# Altium PCB Bodge10080.PcbDoc
Units mm, origin at the board's own origin, x right, y up, seen from the top; angles counter-clockwise.
Board outline 100 x 80 mm, 2 copper layers (Top Layer, Bottom Layer); 9 components, 30 nets, 620 pads, 57 vias.
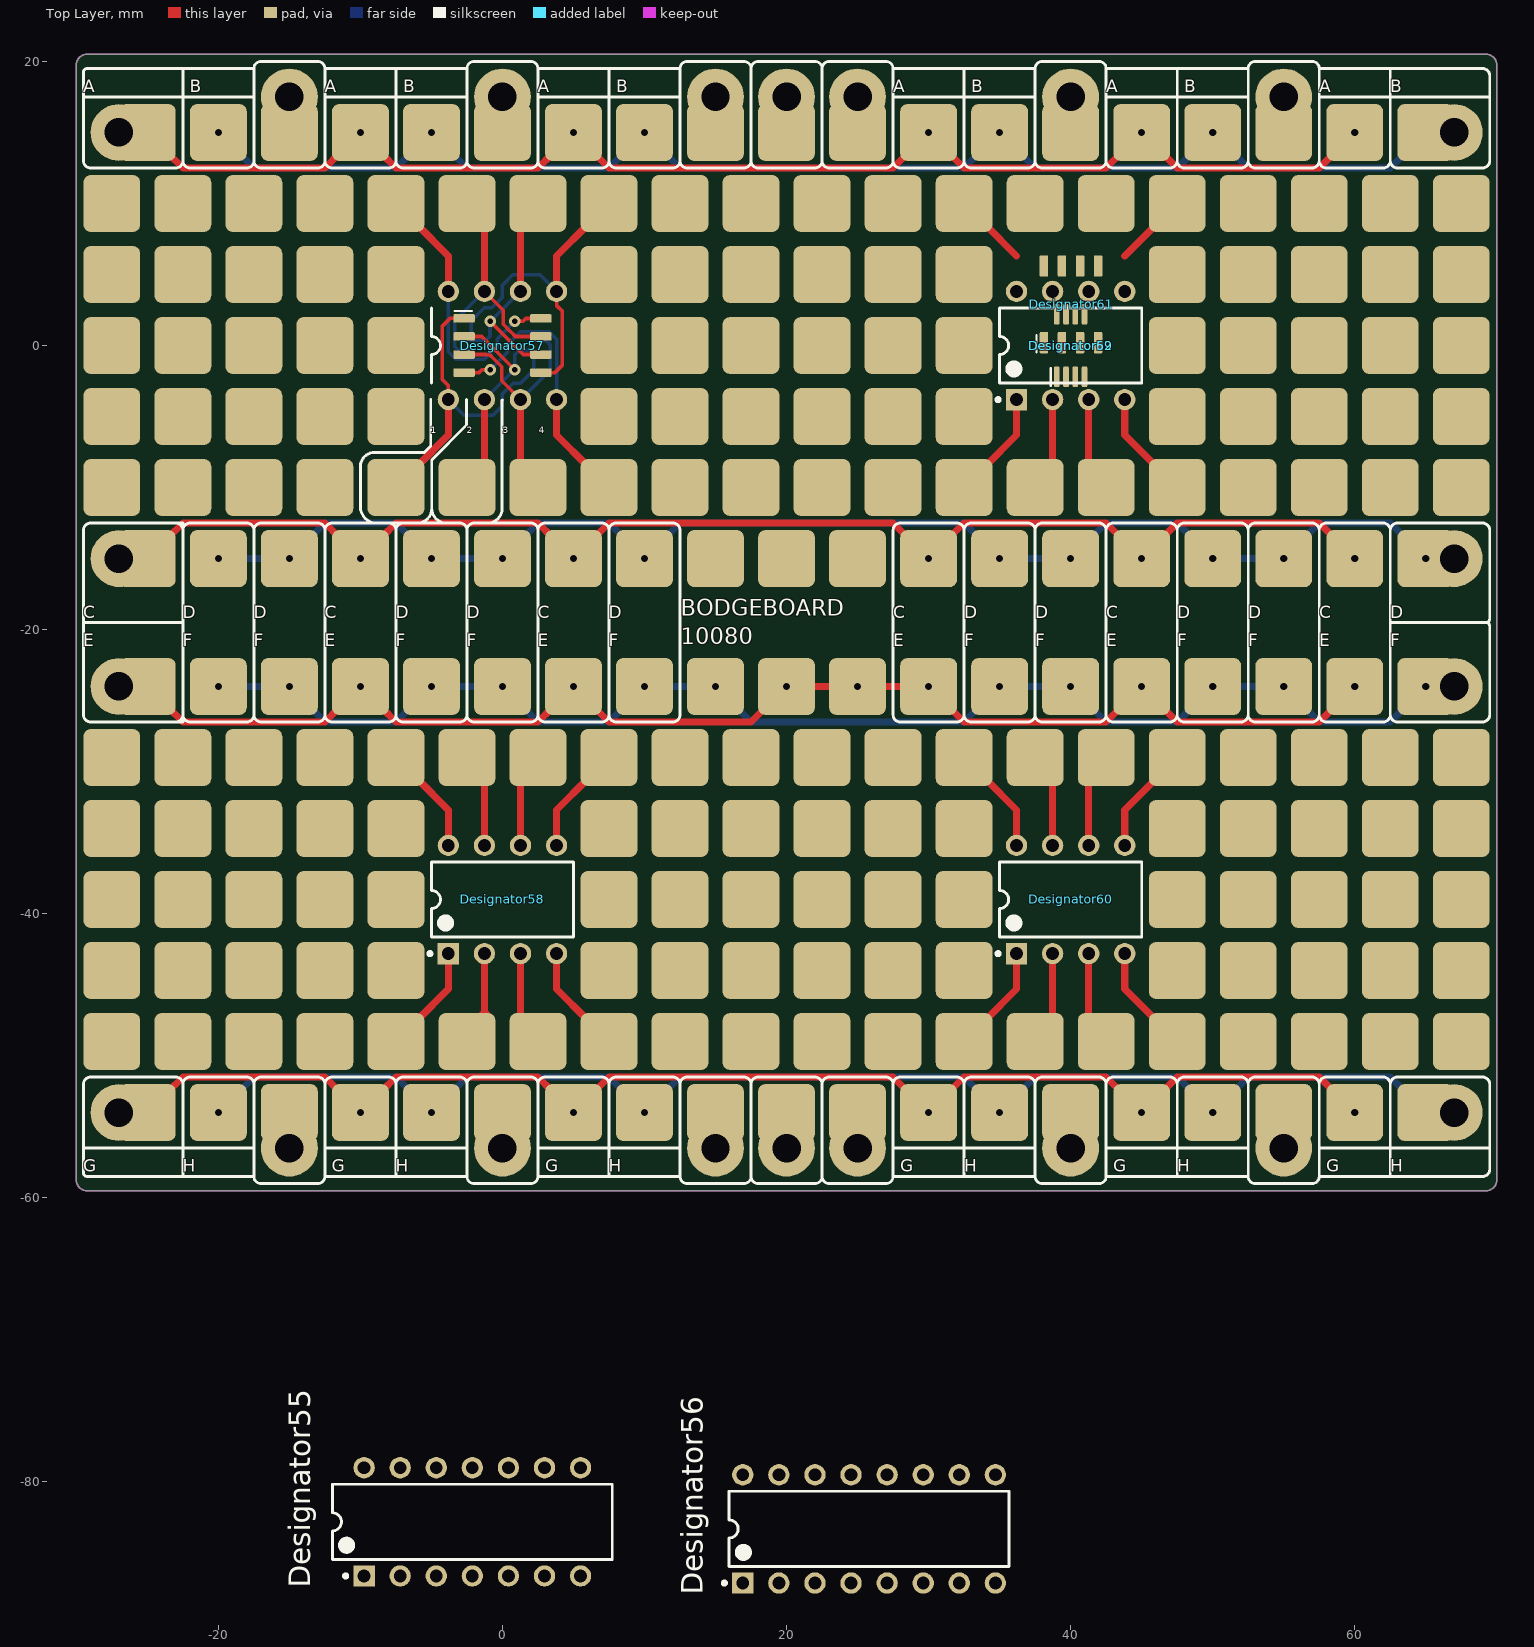
[diagram p0: Top Layer view]
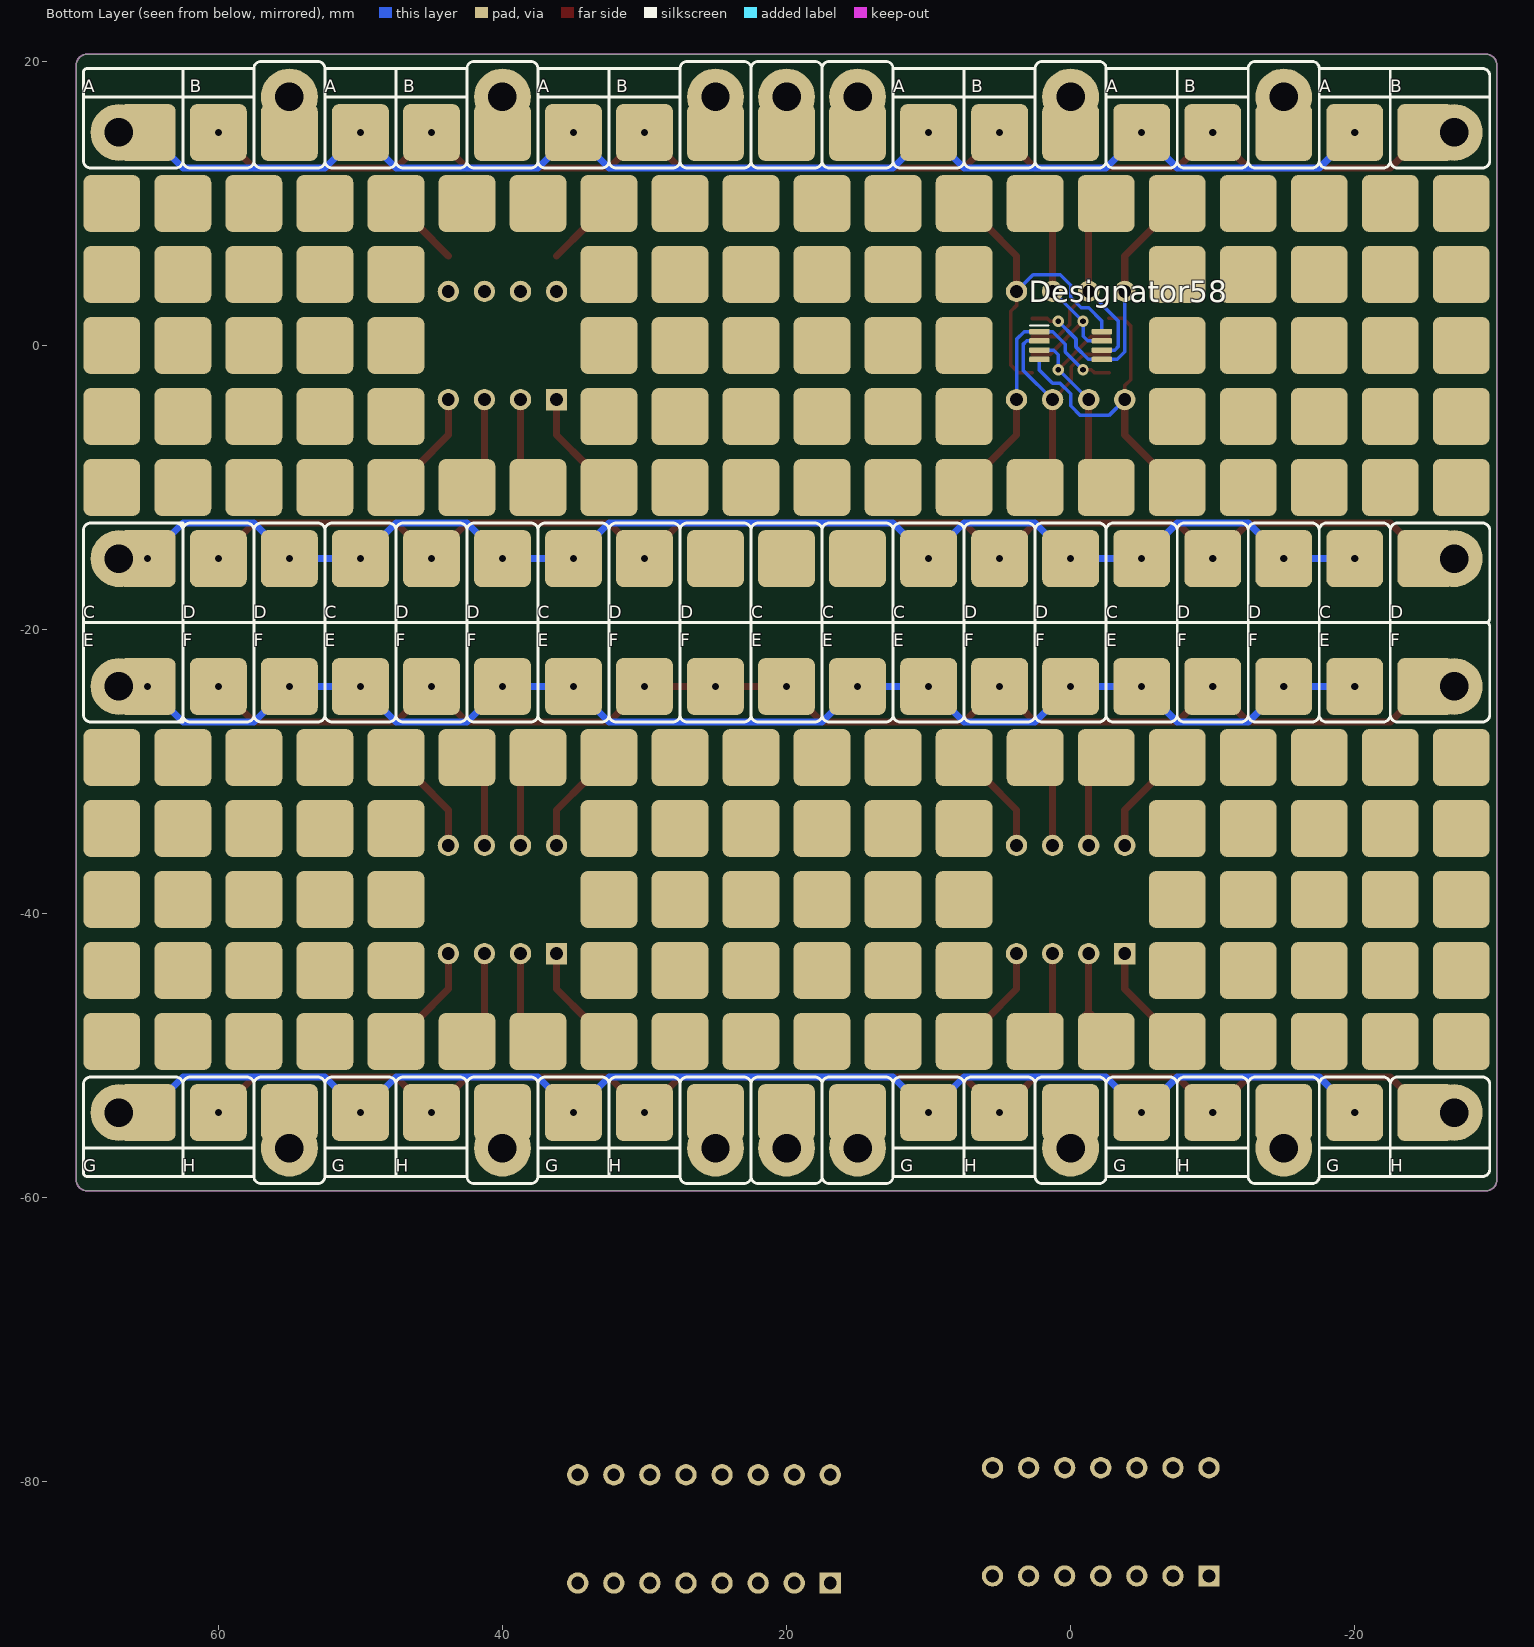
[diagram p1: Bottom Layer view, seen from below]

## Layer stack, top to bottom
Top Solder: solder mask 0.0102, Solder Resist, Dk 3.5
Top Layer: signal copper 0.0356
Dielectric 1: dielectric 0.32, FR-4, Dk 4.8
Bottom Layer: signal copper 0.0356
Bottom Solder: solder mask 0.0102, Solder Resist, Dk 3.5

## Board outline
-30,-58.75 -30,19.75 cw(c-29.25,19.75) -29.25,20.5 69.25,20.5 cw(c69.25,19.75) 70,19.75 70,-58.75 cw(c69.25,-58.75) 69.25,-59.5 -29.25,-59.5 cw(c-29.25,-58.75)

## Design rules (kind name [scope] priority, off if disabled: settings)
Clearance [All] p1: gap=0.2 ignorepadtopadclearanceinfootprint=FALSE
PolygonConnect [All] p1: connectstyle=Relief reliefconductorwidth=0.254 reliefentries=4 polygonreliefangle="90 Angle" airgapwidth=0.254
RoutingVias [All] p1: holewidth=0.4 width=0.8 viastyle="Through Hole" minholewidth=0.3 minwidth=0.4 maxholewidth=0.7 maxwidth=1
SolderMaskExpansion [All] p1: expansion=0.102 istentingtop=FALSE
Width [All] p1: maxlimit=1 minlimit=0.2 preferedwidth=0.5
30 further rules are at their usual default settings.

## Components (designator, comment, footprint, x,y, rotation, side; value= is the part's Value field where it differs from the comment)
Designator55 "Comment" TI-N0014A -2.12,-82.81 r90 top
Designator56 "Comment" N0016A 25.81,-83.31 r90 top
Designator57 "Comment" SO127P600X500-8 0,0 r0 top locked
Designator58 "Comment" SO65P490X300-8 0,0 r180 bottom locked
Designator58 "Comment" VISH-DIP8 0,-39 r90 top
Designator59 "Comment" VISH-DIP8 40,0 r90 top
Designator60 "Comment" VISH-DIP8 40,-39 r90 top
Designator61 "Comment" SO127P600X500-8 40.025,2.9 r90 top locked
Designator62 "Comment" SO65P490X300-8 40,0 r90 top locked

## Footprints (in the part's own frame and the unit in brackets; to place one, negate y for a bottom-side part, rotate by r counter-clockwise, add the part's x,y. Pads: shape width x height; smd on the part's side, far side on the other; paste and mask are expansions set on the pad)
N0016A [mm] "DIP, 16-Leads, Body 19.7x6.6mm, Pitch 2.54mm"
  rect 1.5x1.5 hole 0.9: 1(-3.81,8.89)
  round 1.5 hole 0.9: 2(-3.81,6.35) 3(-3.81,3.81) 4(-3.81,1.27) 5(-3.81,-1.27) 6(-3.81,-3.81) 7(-3.81,-6.35) 8(-3.81,-8.89) 9(3.81,-8.89) 10(3.81,-6.35) 11(3.81,-3.81) 12(3.81,-1.27) 13(3.81,1.27) 14(3.81,3.81) 15(3.81,6.35) 16(3.81,8.89)
  silkscreen extent -3.93,-9.85 2.65,10.31, body extent -3.95,-9.85 3.95,9.85, height 5.08
SO65P490X300-8 [mm] "SO 0.65mm Pitch , 4.9mm Span, 3.00mm Body width, 8 Pins"
  rrect50% 1.45x0.4 smd paste+0 mask+0.05: 1(-2.2,0.975) 2(-2.2,0.325) 3(-2.2,-0.325) 4(-2.2,-0.975) 5(2.2,-0.975) 6(2.2,-0.325) 7(2.2,0.325) 8(2.2,0.975)
  silkscreen extent -2.85,1.4 -1.58,1.4, body extent -2.45,-1.5 2.45,1.5, height 1.1
SO127P600X500-8 [mm] "SO 1.27mm Pitch, 6.00mm Span, 5mm Body Width, 8 Pins"
  rrect25% 1.5x0.6 smd paste+0 mask+0.05: 1(-2.7,1.905) 2(-2.7,0.635) 3(-2.7,-0.635) 4(-2.7,-1.905) 5(2.7,-1.905) 6(2.7,-0.635) 7(2.7,0.635) 8(2.7,1.905)
  silkscreen extent -3.38,2.42 -2.15,2.42, body extent -3,-2.5 3,2.5, height 1.75
TI-N0014A [mm] "DIP, 14-Leads, Body 19.7x6.6mm, Pitch 2.54mm"
  rect 1.5x1.5 hole 0.9: 1(-3.81,7.62)
  round 1.5 hole 0.9: 2(-3.81,5.08) 3(-3.81,2.54) 4(-3.81,0) 5(-3.81,-2.54) 6(-3.81,-5.08) 7(-3.81,-7.62) 8(3.81,-7.62) 9(3.81,-5.08) 10(3.81,-2.54) 11(3.81,0) 12(3.81,2.54) 13(3.81,5.08) 14(3.81,7.62)
  silkscreen extent -3.93,-9.85 2.65,9.85, body extent -3.95,-9.85 3.95,9.85, height 5.08
VISH-DIP8 [mm] "DIP, 8-Leads, Body 9.9x6.8mm, Pitch 2.54mm"
  rect 1.5x1.5 hole 0.9: 1(-3.81,3.81)
  round 1.5 hole 0.9: 2(-3.81,1.27) 3(-3.81,-1.27) 4(-3.81,-3.81) 5(3.81,-3.81) 6(3.81,-1.27) 7(3.81,1.27) 8(3.81,3.81)
  silkscreen extent -3.93,-5 2.65,5.23, body extent -3.95,-4.95 3.95,4.95, height 4.58

## Free pads (board coordinates)
  rrect25% 4x4 smd mask+0.1: 1(-27.5,-49) 1(-27.5,-44) 1(-27.5,-39) 1(-27.5,-34) 1(-27.5,-29) 1(-27.5,-10) 1(-27.5,-5) 1(-27.5,0) 1(-27.5,5) 1(-27.5,10) 3(-22.5,-49) 3(-22.5,-44) 3(-22.5,-39) 3(-22.5,-34) 3(-22.5,-29) 3(-22.5,-10) 3(-22.5,-5) 3(-22.5,0) 3(-22.5,5) 3(-22.5,10) 4(-17.5,-49) 4(-17.5,-44) 4(-17.5,-39) 4(-17.5,-34) 4(-17.5,-29) 4(-17.5,-10) 4(-17.5,-5) 4(-17.5,0) 4(-17.5,5) 4(-17.5,10) 5(-12.5,-49) 5(-12.5,-44) 5(-12.5,-39) 5(-12.5,-34) 5(-12.5,-29) 5(-12.5,-10) 5(-12.5,-5) 5(-12.5,0) 5(-12.5,5) 5(-12.5,10) 6(-7.5,-49) 6(-7.5,-44) 6(-7.5,-39) 6(-7.5,-34) 6(-7.5,-29) 6(-7.5,-10) 6(-7.5,-5) 6(-7.5,0) 6(-7.5,5) 6(-7.5,10) 7(-2.5,-49) 7(-2.5,-29) 7(-2.5,-10) 7(-2.5,10) 8(2.5,-49) 8(2.5,-29) 8(2.5,-10) 8(2.5,10) 9(7.5,-49) 9(7.5,-44) 9(7.5,-39) 9(7.5,-34) 9(7.5,-29) 9(7.5,-10) 9(7.5,-5) 9(7.5,0) 9(7.5,5) 9(7.5,10) 10(12.5,-49) 10(12.5,-44) 10(12.5,-39) 10(12.5,-34) 10(12.5,-29) 10(12.5,-10) 10(12.5,-5) 10(12.5,0) 10(12.5,5) 10(12.5,10) 11(17.5,-49) 11(17.5,-44) 11(17.5,-39) 11(17.5,-34) 11(17.5,-29) 11(17.5,-10) 11(17.5,-5) 11(17.5,0) 11(17.5,5) 11(17.5,10) 12(22.5,-49) 12(22.5,-44) 12(22.5,-39) 12(22.5,-34) 12(22.5,-29) 12(22.5,-10) 12(22.5,-5) 12(22.5,0) 12(22.5,5) 12(22.5,10) 13(27.5,-49) 13(27.5,-44) 13(27.5,-39) 13(27.5,-34) 13(27.5,-29) 13(27.5,-10) 13(27.5,-5) 13(27.5,0) 13(27.5,5) 13(27.5,10) 14(32.5,-49) 14(32.5,-44) 14(32.5,-39) 14(32.5,-34) 14(32.5,-29) 14(32.5,-10) 14(32.5,-5) 14(32.5,0) 14(32.5,5) 14(32.5,10) 15(37.5,-49) 15(37.5,-29) 15(37.5,-10) 15(37.5,10) 16(42.5,-49) 16(42.5,-29) 16(42.5,-10) 16(42.5,10) 17(47.5,-49) 17(47.5,-44) 17(47.5,-39) 17(47.5,-34) 17(47.5,-29) 17(47.5,-10) 17(47.5,-5) 17(47.5,0) 17(47.5,5) 17(47.5,10) 18(52.5,-49) 18(52.5,-44) 18(52.5,-39) 18(52.5,-34) 18(52.5,-29) 18(52.5,-10) 18(52.5,-5) 18(52.5,0) 18(52.5,5) 18(52.5,10) 19(57.5,-49) 19(57.5,-44) 19(57.5,-39) 19(57.5,-34) 19(57.5,-29) 19(57.5,-10) 19(57.5,-5) 19(57.5,0) 19(57.5,5) 19(57.5,10) 20(62.5,-49) 20(62.5,-44) 20(62.5,-39) 20(62.5,-34) 20(62.5,-29) 20(62.5,-10) 20(62.5,-5) 20(62.5,0) 20(62.5,5) 20(62.5,10) 21(67.5,-49) 21(67.5,-44) 21(67.5,-39) 21(67.5,-34) 21(67.5,-29) 21(67.5,-10) 21(67.5,-5) 21(67.5,0) 21(67.5,5) 21(67.5,10) 22(65,-54) 22(65,-24) 22(65,-15) 23(60,-54) 23(60,-24) 23(60,-15) 23(60,15) 24(55,-54) 24(55,-24) 24(55,-15) 24(55,15) 25(50,-54) 25(50,-24) 25(50,-15) 25(50,15) 26(45,-54) 26(45,-24) 26(45,-15) 26(45,15) 27(40,-54) 27(40,-24) 27(40,-15) 27(40,15) 28(35,-54) 28(35,-24) 28(35,-15) 28(35,15) 29(30,-54) 29(30,-24) 29(30,-15) 29(30,15) 30(25,-54) 30(25,-24) 30(25,-15) 30(25,15) 31(20,-54) 31(20,-24) 31(20,-15) 31(20,15) 32(15,-54) 32(15,-24) 32(15,-15) 32(15,15) 33(10,-54) 33(10,-24) 33(10,-15) 33(10,15) 34(5,-54) 34(5,-24) 34(5,-15) 34(5,15) 35(0,-54) 35(0,-24) 35(0,-15) 35(0,15) 36(-5,-54) 36(-5,-24) 36(-5,-15) 36(-5,15) 37(-10,-54) 37(-10,-24) 37(-10,-15) 37(-10,15) 38(-15,-54) 38(-15,-24) 38(-15,-15) 38(-15,15) 39(-20,-54) 39(-20,-24) 39(-20,-15) 39(-20,15) 40(-25,-54) 40(-25,-24) 40(-25,-15) 40(-25,15)
  round 4 hole 2 mask+0.05: 1(-27,-54) 1(-27,-24) 1(-27,-15) 1(-27,15) 1(-15,-56.5) 1(-15,17.5) 1(0,-56.5) 1(0,17.5) 1(15,-56.5) 1(15,17.5) 1(20,-56.5) 1(20,17.5) 1(25,-56.5) 1(25,17.5) 1(40,-56.5) 1(40,17.5) 1(55,-56.5) 1(55,17.5) 2(67,-54) 2(67,-24) 2(67,-15)
  round 1.5 hole 0.9: 1(-3.81,-3.81) 2(-1.27,-3.81) 3(1.27,-3.81) 4(3.81,-3.81) 5(3.81,3.81) 6(1.27,3.81) 7(-1.27,3.81) 8(-3.81,3.81)
  rrect25% 4x4 smd far side mask+0.1: 1(67.5,-49) 1(67.5,-44) 1(67.5,-39) 1(67.5,-34) 1(67.5,-29) 1(67.5,-10) 1(67.5,-5) 1(67.5,0) 1(67.5,5) 1(67.5,10) 3(62.5,-49) 3(62.5,-44) 3(62.5,-39) 3(62.5,-34) 3(62.5,-29) 3(62.5,-10) 3(62.5,-5) 3(62.5,0) 3(62.5,5) 3(62.5,10) 4(57.5,-49) 4(57.5,-44) 4(57.5,-39) 4(57.5,-34) 4(57.5,-29) 4(57.5,-10) 4(57.5,-5) 4(57.5,0) 4(57.5,5) 4(57.5,10) 5(52.5,-49) 5(52.5,-44) 5(52.5,-39) 5(52.5,-34) 5(52.5,-29) 5(52.5,-10) 5(52.5,-5) 5(52.5,0) 5(52.5,5) 5(52.5,10) 6(47.5,-49) 6(47.5,-44) 6(47.5,-39) 6(47.5,-34) 6(47.5,-29) 6(47.5,-10) 6(47.5,-5) 6(47.5,0) 6(47.5,5) 6(47.5,10) 7(42.5,-49) 7(42.5,-29) 7(42.5,-10) 7(42.5,10) 8(37.5,-49) 8(37.5,-29) 8(37.5,-10) 8(37.5,10) 9(32.5,-49) 9(32.5,-44) 9(32.5,-39) 9(32.5,-34) 9(32.5,-29) 9(32.5,-10) 9(32.5,-5) 9(32.5,0) 9(32.5,5) 9(32.5,10) 10(27.5,-49) 10(27.5,-44) 10(27.5,-39) 10(27.5,-34) 10(27.5,-29) 10(27.5,-10) 10(27.5,-5) 10(27.5,0) 10(27.5,5) 10(27.5,10) 11(22.5,-49) 11(22.5,-44) 11(22.5,-39) 11(22.5,-34) 11(22.5,-29) 11(22.5,-10) 11(22.5,-5) 11(22.5,0) 11(22.5,5) 11(22.5,10) 12(17.5,-49) 12(17.5,-44) 12(17.5,-39) 12(17.5,-34) 12(17.5,-29) 12(17.5,-10) 12(17.5,-5) 12(17.5,0) 12(17.5,5) 12(17.5,10) 13(12.5,-49) 13(12.5,-44) 13(12.5,-39) 13(12.5,-34) 13(12.5,-29) 13(12.5,-10) 13(12.5,-5) 13(12.5,0) 13(12.5,5) 13(12.5,10) 14(7.5,-49) 14(7.5,-44) 14(7.5,-39) 14(7.5,-34) 14(7.5,-29) 14(7.5,-10) 14(7.5,-5) 14(7.5,0) 14(7.5,5) 14(7.5,10) 15(2.5,-49) 15(2.5,-29) 15(2.5,-10) 15(2.5,10) 16(-2.5,-49) 16(-2.5,-29) 16(-2.5,-10) 16(-2.5,10) 17(-7.5,-49) 17(-7.5,-44) 17(-7.5,-39) 17(-7.5,-34) 17(-7.5,-29) 17(-7.5,-10) 17(-7.5,-5) 17(-7.5,0) 17(-7.5,5) 17(-7.5,10) 18(-12.5,-49) 18(-12.5,-44) 18(-12.5,-39) 18(-12.5,-34) 18(-12.5,-29) 18(-12.5,-10) 18(-12.5,-5) 18(-12.5,0) 18(-12.5,5) 18(-12.5,10) 19(-17.5,-49) 19(-17.5,-44) 19(-17.5,-39) 19(-17.5,-34) 19(-17.5,-29) 19(-17.5,-10) 19(-17.5,-5) 19(-17.5,0) 19(-17.5,5) 19(-17.5,10) 20(-22.5,-49) 20(-22.5,-44) 20(-22.5,-39) 20(-22.5,-34) 20(-22.5,-29) 20(-22.5,-10) 20(-22.5,-5) 20(-22.5,0) 20(-22.5,5) 20(-22.5,10) 21(-27.5,-49) 21(-27.5,-44) 21(-27.5,-39) 21(-27.5,-34) 21(-27.5,-29) 21(-27.5,-10) 21(-27.5,-5) 21(-27.5,0) 21(-27.5,5) 21(-27.5,10) 22(65,-54) 22(65,-24) 22(65,-15) 23(60,-54) 23(60,-24) 23(60,-15) 23(60,15) 24(55,-54) 24(55,-24) 24(55,-15) 24(55,15) 25(50,-54) 25(50,-24) 25(50,-15) 25(50,15) 26(45,-54) 26(45,-24) 26(45,-15) 26(45,15) 27(40,-54) 27(40,-24) 27(40,-15) 27(40,15) 28(35,-54) 28(35,-24) 28(35,-15) 28(35,15) 29(30,-54) 29(30,-24) 29(30,-15) 29(30,15) 30(25,-54) 30(25,-24) 30(25,-15) 30(25,15) 31(20,-54) 31(20,-24) 31(20,-15) 31(20,15) 32(15,-54) 32(15,-24) 32(15,-15) 32(15,15) 33(10,-54) 33(10,-24) 33(10,-15) 33(10,15) 34(5,-54) 34(5,-24) 34(5,-15) 34(5,15) 35(0,-54) 35(0,-24) 35(0,-15) 35(0,15) 36(-5,-54) 36(-5,-24) 36(-5,-15) 36(-5,15) 37(-10,-54) 37(-10,-24) 37(-10,-15) 37(-10,15) 38(-15,-54) 38(-15,-24) 38(-15,-15) 38(-15,15) 39(-20,-54) 39(-20,-24) 39(-20,-15) 39(-20,15) 40(-25,-54) 40(-25,-24) 40(-25,-15) 40(-25,15)
  round 4 hole 2 mask+0.1: 2(67,15)
  rrect25% 4x4 smd mask-4: 22(65,15)
  rrect25% 4x4 smd far side mask-4: 22(65,15)

## Via types
v1: diameter 1.1, hole 0.5, Top Layer to Bottom Layer, 53 vias
v2: diameter 0.8, hole 0.4, Top Layer to Bottom Layer, 4 vias

## Nets (pads, with @x,y where several pads share a name; then routed paths per layer and width w, separated by ;. In a path a pad name is that pad's centre, name@x,y a point inside that pad or via, vN(x,y) a via of type N, cw(c..) or ccw(c..) an arc to the next point about the centre after c; other vN are vias at no path point)
A: pad.1@-27,15 pad.23@60,15 pad.26@45,15 pad.29@30,15 pad.34@5,15 pad.37@-10,15 pad.40@-25,15 | length 86.2
  Top Layer w0.5: pad.40@-23.5,13.5 -22.5,12.5 -17.5,12.5 -12.5,12.5 pad.37@-11.5,13.5 ; pad.37@-8.5,13.5 -7.5,12.5 -2.5,12.5 2.5,12.5 pad.34@3.5,13.5 ; v1(5,15) 7.5,12.5 27.5,12.5 pad.29@29.5,14.5 ; v1(30,15) 32.5,12.5 42.5,12.5 v1(45,15) 47.5,12.5 57.5,12.5 v1(60,15)
  other v1: -10,15
B: pad.2@67,15 pad.22@65,15 pad.25@50,15 pad.28@35,15 pad.33@10,15 pad.36@-5,15 pad.39@-20,15 | length 94.6
  Bottom Layer w0.5: v1(-20,15) -17.5,12.5 -7.5,12.5 -5.5,14.5 v1(-5,15) -2.5,12.5 7.5,12.5 v1(10,15) 12.5,12.5 32.5,12.5 v1(35,15) 37.5,12.5 47.5,12.5 v1(50,15) 52.5,12.5 62.5,12.5 pad.22@64.5,14.5
C: pad.1@-27,-15 pad.23@60,-15 pad.26@45,-15 pad.29@30,-15 pad.34@5,-15 pad.37@-10,-15 pad.40@-25,-15 | length 86.9
  Top Layer w0.5: pad.40@-23.5,-13.5 -22.5,-12.5 -12.5,-12.5 pad.37@-11.5,-13.5 ; pad.37@-8.5,-13.5 -7.5,-12.5 2.5,-12.5 pad.34@3.5,-13.5 ; v1(5,-15) 7.5,-12.5 27.5,-12.5 v1(30,-15) 32.5,-12.5 42.5,-12.5 v1(45,-15) 47.5,-12.5 57.5,-12.5 v1(60,-15)
  other v1: -10,-15
D: pad.2@67,-15 pad.22@65,-15 pad.24@55,-15 pad.25@50,-15 pad.27@40,-15 pad.28@35,-15 pad.33@10,-15 pad.35@0,-15 pad.36@-5,-15 pad.38@-15,-15 pad.39@-20,-15 | length 95.4
  Bottom Layer w0.5: v1(-20,-15) v1(-15,-15) -12.5,-12.5 -7.5,-12.5 v1(-5,-15) v1(0,-15) 2.5,-12.5 7.5,-12.5 v1(10,-15) 12.5,-12.5 32.5,-12.5 v1(35,-15) v1(40,-15) 42.5,-12.5 47.5,-12.5 v1(50,-15) v1(55,-15) 57.5,-12.5 62.5,-12.5 v1(65,-15)
E: pad.1@-27,-24 pad.23@60,-24 pad.26@45,-24 pad.29@30,-24 pad.30@25,-24 pad.31@20,-24 pad.34@5,-24 pad.37@-10,-24 pad.40@-25,-24 | length 104.5
  Top Layer w0.5: pad.40@-23.5,-25.5 -22.5,-26.5 -17.5,-26.5 -12.5,-26.5 pad.37@-11.5,-25.5 ; pad.37@-8.5,-25.5 -7.5,-26.5 -2.5,-26.5 2.5,-26.5 pad.34@3.5,-25.5 ; 7.5,-26.5 v1(5,-24) 7.5,-26.5 ; 7.5,-26.5 17.5,-26.5 v1(20,-24) v1(30,-24) ; v1(30,-24) 32.5,-26.5 ; v1(30,-24) 32.5,-26.5 ; 32.5,-26.5 42.5,-26.5 ; 42.5,-26.5 v1(45,-24) ; 42.5,-26.5 v1(45,-24) ; v1(45,-24) 47.5,-26.5 ; v1(45,-24) 47.5,-26.5 ; 47.5,-26.5 57.5,-26.5 ; 57.5,-26.5 v1(60,-24) 57.5,-26.5
  other v1: -10,-24 25,-24
F: pad.2@67,-24 pad.22@65,-24 pad.24@55,-24 pad.25@50,-24 pad.27@40,-24 pad.28@35,-24 pad.32@15,-24 pad.33@10,-24 pad.35@0,-24 pad.36@-5,-24 pad.38@-15,-24 pad.39@-20,-24 | length 95.4
  Bottom Layer w0.5: v1(-20,-24) v1(-15,-24) -12.5,-26.5 -7.5,-26.5 v1(-5,-24) v1(0,-24) 2.5,-26.5 7.5,-26.5 v1(10,-24) v1(15,-24) 17.5,-26.5 32.5,-26.5 v1(35,-24) v1(40,-24) 42.5,-26.5 47.5,-26.5 v1(50,-24) v1(55,-24) 57.5,-26.5 62.5,-26.5 v1(65,-24)
G: pad.1@-27,-54 pad.23@60,-54 pad.26@45,-54 pad.29@30,-54 pad.34@5,-54 pad.37@-10,-54 pad.40@-25,-54 | length 86.2
  Top Layer w0.5: pad.40@-23.5,-52.5 -22.5,-51.5 -17.5,-51.5 -12.5,-51.5 pad.37@-11.5,-52.5 ; pad.37@-8.5,-52.5 -7.5,-51.5 -2.5,-51.5 2.5,-51.5 pad.34@3.5,-52.5 ; v1(5,-54) 7.5,-51.5 27.5,-51.5 pad.29@29.5,-53.5 ; v1(30,-54) 32.5,-51.5 42.5,-51.5 v1(45,-54) 47.5,-51.5 57.5,-51.5 v1(60,-54)
  other v1: -10,-54
H: pad.2@67,-54 pad.22@65,-54 pad.25@50,-54 pad.28@35,-54 pad.33@10,-54 pad.36@-5,-54 pad.39@-20,-54 | length 94.6
  Bottom Layer w0.5: v1(-20,-54) -17.5,-51.5 -7.5,-51.5 -5.5,-53.5 v1(-5,-54) -2.5,-51.5 7.5,-51.5 v1(10,-54) 12.5,-51.5 32.5,-51.5 v1(35,-54) 37.5,-51.5 47.5,-51.5 v1(50,-54) 52.5,-51.5 62.5,-51.5 pad.22@64.5,-53.5
IO1: pad.1@-15,17.5 pad.38@-15,15
IO2: pad.1@0,17.5 pad.35@0,15
IO3: pad.1@15,17.5 pad.32@15,15
IO4: pad.1@20,17.5 pad.31@20,15
IO5: pad.1@25,17.5 pad.30@25,15
IO6: pad.1@40,17.5 pad.27@40,15
IO7: pad.1@55,17.5 pad.24@55,15
IO8: pad.1@55,-56.5 pad.24@55,-54
IO9: pad.1@40,-56.5 pad.27@40,-54
IO10: pad.1@25,-56.5 pad.30@25,-54
IO11: pad.1@20,-56.5 pad.31@20,-54
IO12: pad.1@15,-56.5 pad.32@15,-54
IO13: pad.1@0,-56.5 pad.35@0,-54
IO14: pad.1@-15,-56.5 pad.38@-15,-54
UA1: Designator57.1 Designator58.4@2.2,-0.975 pad.1@-3.81,-3.81 pad.6@-7.5,-10 | length 21.7
  Top Layer w0.25: pad.1@-3.81,-3.81 -3.81,-2.815 -4.225,-2.4 -4.225,1.375 -3.695,1.905 Designator57.1
  Top Layer w0.5: pad.6@-6,-8.5 -3.81,-6.31 pad.1@-3.81,-3.81
  Bottom Layer w0.25: pad.1@-3.81,-3.81 -2.695,-4.925 -0.675,-4.925 0,-4.25 0,-3.4 0.75,-2.65 1.275,-2.65 2.2,-1.725 Designator58.4@2.2,-0.975
UA2: Designator57.2 Designator58.3@2.2,-0.325 pad.2@-1.27,-3.81 pad.7@-2.5,-10 | length 15.1
  Top Layer w0.254: Designator57.2 -1.46,0.635 v2@0.875,-1.7
  Top Layer w0.5: pad.7@-1.27,-8.27 pad.2@-1.27,-3.81
  Bottom Layer w0.25: pad.2@-1.7,-3.38 -1.27,-3.81 0.84,-1.7 0.875,-1.7 0.875,-0.65 1.2,-0.325 Designator58.3@2.2,-0.325
  other v2: 0.87,-1.7
UA3: Designator57.3 Designator58.2@2.2,0.325 pad.3@1.27,-3.81 pad.8@2.5,-10 | length 16.3
  Top Layer w0.25: -0.915,-0.635 -0.575,-0.975 -0.57,-0.975 -0.05,-1.495 -0.05,-2.49 pad.3@1.27,-3.81
  Top Layer w0.254: Designator57.3 -0.915,-0.635
  Top Layer w0.5: pad.8@1.27,-8.27 pad.3@1.27,-3.81
  Bottom Layer w0.25: pad.3@1.27,-3.81 3.35,-1.73 3.35,0.075 3.1,0.325 Designator58.2@2.2,0.325
UA4: Designator57.4 Designator58.1@2.2,0.975 pad.4@3.81,-3.81 pad.9@7.5,-10 | length 18.1
  Top Layer w0.25: -1.65,-1.905 -1.445,-1.7 v2(-0.87,-1.7)
  Top Layer w0.254: Designator57.4 -1.65,-1.905
  Top Layer w0.5: pad.4@3.81,-3.81 3.81,-6.31 pad.9@6,-8.5
  Bottom Layer w0.25: v2(-0.87,-1.7) 0.375,-0.455 0.375,0.1 1.25,0.975 2.2,0.975 3.275,0.975 3.81,0.44 pad.4@3.81,-3.81
UA5: Designator57.5 Designator58.8@-2.2,0.975 pad.5@3.81,3.81 pad.9@7.5,10 | length 21.8
  Top Layer w0.25: Designator57.5 3.695,-1.905 4.225,-1.375 4.225,2.4 3.81,2.815 pad.5@3.81,3.81
  Top Layer w0.5: pad.5@3.81,3.81 3.81,6.31 pad.9@6,8.5
  Bottom Layer w0.25: Designator58.8@-2.2,0.975 -2.2,1.725 -1.275,2.65 -0.75,2.65 0,3.4 0,4.25 0.725,4.975 2.645,4.975 pad.5@3.81,3.81
UA6: Designator57.6 Designator58.7@-2.2,0.325 pad.6@1.27,3.81 pad.8@2.5,10 | length 15.1
  Top Layer w0.254: v2@-0.875,1.7 1.46,-0.635 Designator57.6
  Top Layer w0.5: pad.6@1.27,3.81 pad.8@1.27,8.27
  Bottom Layer w0.25: Designator58.7@-2.2,0.325 -1.2,0.325 -0.875,0.65 -0.875,1.7 -0.84,1.7 1.27,3.81 pad.6@1.7,3.38
  other v2: -0.87,1.7
UA7: Designator57.7 Designator58.6@-2.2,-0.325 pad.7@-1.27,3.81 pad.7@-2.5,10 | length 16.3
  Top Layer w0.25: pad.7@-1.27,3.81 0.05,2.49 0.05,1.495 0.57,0.975 0.575,0.975 0.915,0.635
  Top Layer w0.254: 0.915,0.635 Designator57.7
  Top Layer w0.5: pad.7@-1.27,3.81 pad.7@-1.27,8.27
  Bottom Layer w0.25: Designator58.6@-2.2,-0.325 -3.1,-0.325 -3.35,-0.075 -3.35,1.73 pad.7@-1.27,3.81
UA8: Designator57.8 Designator58.5@-2.2,-0.975 pad.6@-7.5,10 pad.8@-3.81,3.81 | length 18.1
  Top Layer w0.25: v2(0.87,1.7) 1.445,1.7 1.65,1.905
  Top Layer w0.254: 1.65,1.905 Designator57.8
  Top Layer w0.5: pad.6@-6,8.5 -3.81,6.31 pad.8@-3.81,3.81
  Bottom Layer w0.25: pad.8@-3.81,3.81 -3.81,-0.44 -3.275,-0.975 -2.2,-0.975 -1.25,-0.975 -0.375,-0.1 -0.375,0.455 v2(0.87,1.7)
pads on no net: Designator55.1 Designator55.2 Designator55.3 Designator55.4 Designator55.5 Designator55.6 Designator55.7 Designator55.8 Designator55.9 Designator55.10 Designator55.11 Designator55.12 Designator55.13 Designator55.14 Designator56.1 Designator56.2 Designator56.3 Designator56.4 Designator56.5 Designator56.6 Designator56.7 Designator56.8 Designator56.9 Designator56.10 Designator56.11 Designator56.12 Designator56.13 Designator56.14 Designator56.15 Designator56.16 Designator58.1@-3.81,-42.81 Designator58.2@-1.27,-42.81 Designator58.3@1.27,-42.81 Designator58.4@3.81,-42.81 Designator58.5@3.81,-35.19 Designator58.6@1.27,-35.19 Designator58.7@-1.27,-35.19 Designator58.8@-3.81,-35.19 Designator59.1 Designator59.2 Designator59.3 Designator59.4 Designator59.5 Designator59.6 Designator59.7 Designator59.8 Designator60.1 Designator60.2 Designator60.3 Designator60.4 Designator60.5 Designator60.6 Designator60.7 Designator60.8 Designator61.1 Designator61.2 Designator61.3 Designator61.4 Designator61.5 Designator61.6 Designator61.7 Designator61.8 Designator62.1 Designator62.2 Designator62.3 Designator62.4 Designator62.5 Designator62.6 Designator62.7 Designator62.8
copper on no net: | length 108.5
  Top Layer w0.5: -6,-47.5 -3.81,-45.31 -3.81,-42.81 ; -6,-30.5 -3.81,-32.69 -3.81,-35.19 ; -1.27,-47.27 -1.27,-42.81 ; -1.27,-35.19 -1.27,-30.73 ; 1.27,-47.27 1.27,-42.81 ; 1.27,-35.19 1.27,-30.73 ; 3.81,-42.81 3.81,-45.31 6,-47.5 ; 3.81,-35.19 3.81,-32.69 6,-30.5 ; 34,-47.5 36.19,-45.31 36.19,-42.81 ; 34,-30.5 36.19,-32.69 36.19,-35.19 ; 34,-8.5 36.19,-6.31 36.19,-3.81 ; 34,8.5 36.19,6.31 ; 38.73,-47.27 38.73,-42.81 ; 38.73,-35.19 38.73,-30.73 ; 38.73,-8.27 38.73,-3.81 ; 41.27,-47.27 41.27,-42.81 ; 41.27,-35.19 41.27,-30.73 ; 41.27,-8.27 41.27,-3.81 ; 43.81,-42.81 43.81,-45.31 46,-47.5 ; 43.81,-35.19 43.81,-32.69 46,-30.5 ; 43.81,-3.81 43.81,-6.31 46,-8.5 ; 43.81,6.31 46,8.5
  Top Layer w1: -2.5,-48.5 -1.27,-47.27

## Keep-outs
Keep-Out Layer:
  lines w0.1: -30,-58.75 ccw(c-29.25,-58.75) -29.25,-59.5 -27.25,-59.5 69.25,-59.5 ccw(c69.25,-58.75) 70,-58.75 70,19.75 ccw(c69.25,19.75) 69.25,20.5 -29.25,20.5 ccw(c-29.25,19.75) -30,19.75 -30,-58.75

## Silkscreen, mask and mechanical layers (free items; w line width, h text height)
Top Overlay:
  drawing of 438 lines, arcs and shapes, not listed
  text "A" at -29.5,17.5 h1.5
  text "B" at -22,17.5 h1.5
  text "A" at -12.5,17.5 h1.5
  text "B" at -7,17.5 h1.5
  text "A" at 2.5,17.5 h1.5
  text "B" at 8,17.5 h1.5
  text "A" at 27.5,17.5 h1.5
  text "B" at 33,17.5 h1.5
  text "A" at 42.5,17.5 h1.5
  text "B" at 48,17.5 h1.5
  text "A" at 57.5,17.5 h1.5
  text "B" at 62.5,17.5 h1.5
  text "1" at -5.05,-6.35 h0.8
  text "2" at -2.525,-6.35 h0.8
  text "3" at 0.03,-6.35 h0.8
  text "4" at 2.555,-6.35 h0.8
  text "C" at -29.5,-19.5 h1.5
  text "D" at -22.5,-19.5 h1.5
  text "D" at -17.5,-19.5 h1.5
  text "C" at -12.5,-19.5 h1.5
  text "D" at -7.5,-19.5 h1.5
  text "D" at -2.5,-19.5 h1.5
  text "C" at 2.5,-19.5 h1.5
  text "D" at 7.5,-19.5 h1.5
  text "C" at 27.5,-19.5 h1.5
  text "D" at 32.5,-19.5 h1.5
  text "D" at 37.5,-19.5 h1.5
  text "C" at 42.5,-19.5 h1.5
  text "D" at 47.5,-19.5 h1.5
  text "D" at 52.5,-19.5 h1.5
  text "C" at 57.5,-19.5 h1.5
  text "D" at 62.5,-19.5 h1.5
  text "BODGEBOARD / 10080" at 12.55,-21.425 h2
  text "E" at -29.5,-21.5 h1.5
  text "F" at -22.5,-21.5 h1.5
  text "F" at -17.5,-21.5 h1.5
  text "E" at -12.5,-21.5 h1.5
  text "F" at -7.5,-21.5 h1.5
  text "F" at -2.5,-21.5 h1.5
  text "E" at 2.5,-21.5 h1.5
  text "F" at 7.5,-21.5 h1.5
  text "E" at 27.5,-21.5 h1.5
  text "F" at 32.5,-21.5 h1.5
  text "F" at 37.5,-21.5 h1.5
  text "E" at 42.5,-21.5 h1.5
  text "F" at 47.5,-21.5 h1.5
  text "F" at 52.5,-21.5 h1.5
  text "E" at 57.5,-21.5 h1.5
  text "F" at 62.5,-21.5 h1.5
  text "G" at -29.5,-58.5 h1.5
  text "H" at -22.5,-58.5 h1.5
  text "G" at -12,-58.5 h1.5
  text "H" at -7.5,-58.5 h1.5
  text "G" at 3,-58.5 h1.5
  text "H" at 7.5,-58.5 h1.5
  text "G" at 28,-58.5 h1.5
  text "H" at 32.5,-58.5 h1.5
  text "G" at 43,-58.5 h1.5
  text "H" at 47.5,-58.5 h1.5
  text "G" at 58,-58.5 h1.5
  text "H" at 62.5,-58.5 h1.5
Bottom Overlay:
  drawing of 444 lines, arcs and shapes, not listed
  text "B" at -22.5,17.5 h1.5
  text "A" at -17.5,17.5 h1.5
  text "B" at -8,17.5 h1.5
  text "A" at -2.5,17.5 h1.5
  text "B" at 7,17.5 h1.5
  text "A" at 12.5,17.5 h1.5
  text "B" at 32,17.5 h1.5
  text "A" at 37.5,17.5 h1.5
  text "B" at 47,17.5 h1.5
  text "A" at 52.5,17.5 h1.5
  text "B" at 62,17.5 h1.5
  text "A" at 69.5,17.5 h1.5
  text "D" at -22.5,-19.5 h1.5
  text "C" at -17.5,-19.5 h1.5
  text "D" at -12.5,-19.5 h1.5
  text "D" at -7.5,-19.5 h1.5
  text "C" at -2.5,-19.5 h1.5
  text "D" at 2.5,-19.5 h1.5
  text "D" at 7.5,-19.5 h1.5
  text "C" at 12.5,-19.5 h1.5
  text "C" at 17.5,-19.5 h1.5
  text "C" at 22.5,-19.5 h1.5
  text "D" at 27.5,-19.5 h1.5
  text "D" at 32.5,-19.5 h1.5
  text "C" at 37.5,-19.5 h1.5
  text "D" at 42.5,-19.5 h1.5
  text "D" at 47.5,-19.5 h1.5
  text "C" at 52.5,-19.5 h1.5
  text "D" at 57.5,-19.5 h1.5
  text "D" at 62.5,-19.5 h1.5
  text "C" at 69.5,-19.5 h1.5
  text "F" at -22.5,-21.5 h1.5
  text "E" at -17.5,-21.5 h1.5
  text "F" at -12.5,-21.5 h1.5
  text "F" at -7.5,-21.5 h1.5
  text "E" at -2.5,-21.5 h1.5
  text "F" at 2.5,-21.5 h1.5
  text "F" at 7.5,-21.5 h1.5
  text "E" at 12.5,-21.5 h1.5
  text "E" at 17.5,-21.5 h1.5
  text "E" at 22.5,-21.5 h1.5
  text "F" at 27.5,-21.5 h1.5
  text "F" at 32.5,-21.5 h1.5
  text "E" at 37.5,-21.5 h1.5
  text "F" at 42.5,-21.5 h1.5
  text "F" at 47.5,-21.5 h1.5
  text "E" at 52.5,-21.5 h1.5
  text "F" at 57.5,-21.5 h1.5
  text "F" at 62.5,-21.5 h1.5
  text "E" at 69.5,-21.5 h1.5
  text "H" at -22.5,-58.5 h1.5
  text "G" at -18,-58.5 h1.5
  text "H" at -7.5,-58.5 h1.5
  text "G" at -3,-58.5 h1.5
  text "H" at 7.5,-58.5 h1.5
  text "G" at 12,-58.5 h1.5
  text "H" at 32.5,-58.5 h1.5
  text "G" at 37,-58.5 h1.5
  text "H" at 47.5,-58.5 h1.5
  text "G" at 52,-58.5 h1.5
  text "H" at 62.5,-58.5 h1.5
  text "G" at 69.5,-58.5 h1.5
Top Solder:
  region: 63.5,17.1 ccw(c63.5,16.5) 62.9,16.5 62.9,14.6 64.45,14.6 64.45,15 cw(c67.512,14.8) 65.125,16.728 65.125,17.1 63.735,17.1
  region: 65.125,13.272 65.125,12.9 64.675,12.9 63.5,12.9 cw(c63.5,13.5) 62.9,13.5 62.9,15.4 64.45,15.4 64.45,15 ccw(c67,15)
  region: 63.5,12.9 cw(c63.5,13.5) 62.9,13.5 62.9,15.4 64.45,15.4 64.45,15 ccw(c67.512,15.2) 65.125,13.272 65.125,12.9 63.735,12.9
Mechanical 13:
  circle w0.1: c-4.05,-2.5 r0.5
  lines w0.1: -4.95,-3.4 4.95,-3.4 4.95,3.4 -4.95,3.4 -4.95,-3.4
Mechanical 15:
  lines w0.05: -5.25,-4.85 5.25,-4.85 5.25,4.85 -5.25,4.85 -5.25,-4.85
  lines w0.1: -0.5,0 0.5,0 ; 0,-0.5 0,0.5

## Text inside footprints (layer, text, board x,y; h text height)
Designator57: Top Assembly "1" at -3.45,1.6 h0.4
Designator58: Bottom Assembly "1" at 2.925,0.775 h0.4
Designator61: Top Assembly "1" at 38.425,-0.55 h0.4 r90
Designator62: Top Assembly "1" at 39.225,-2.925 h0.4 r90